# Altium PCB LED_Microcontroller_LED_PCB.PcbDoc
Units mm, origin at the board's own origin, x right, y up, seen from the top; angles counter-clockwise.
Board outline 88.3 x 38.73 mm, 2 copper layers (Top Layer, Bottom Layer); 42 components, 38 nets, 186 pads, 33 vias.
Unrouted connection lines stored in the file: 8.
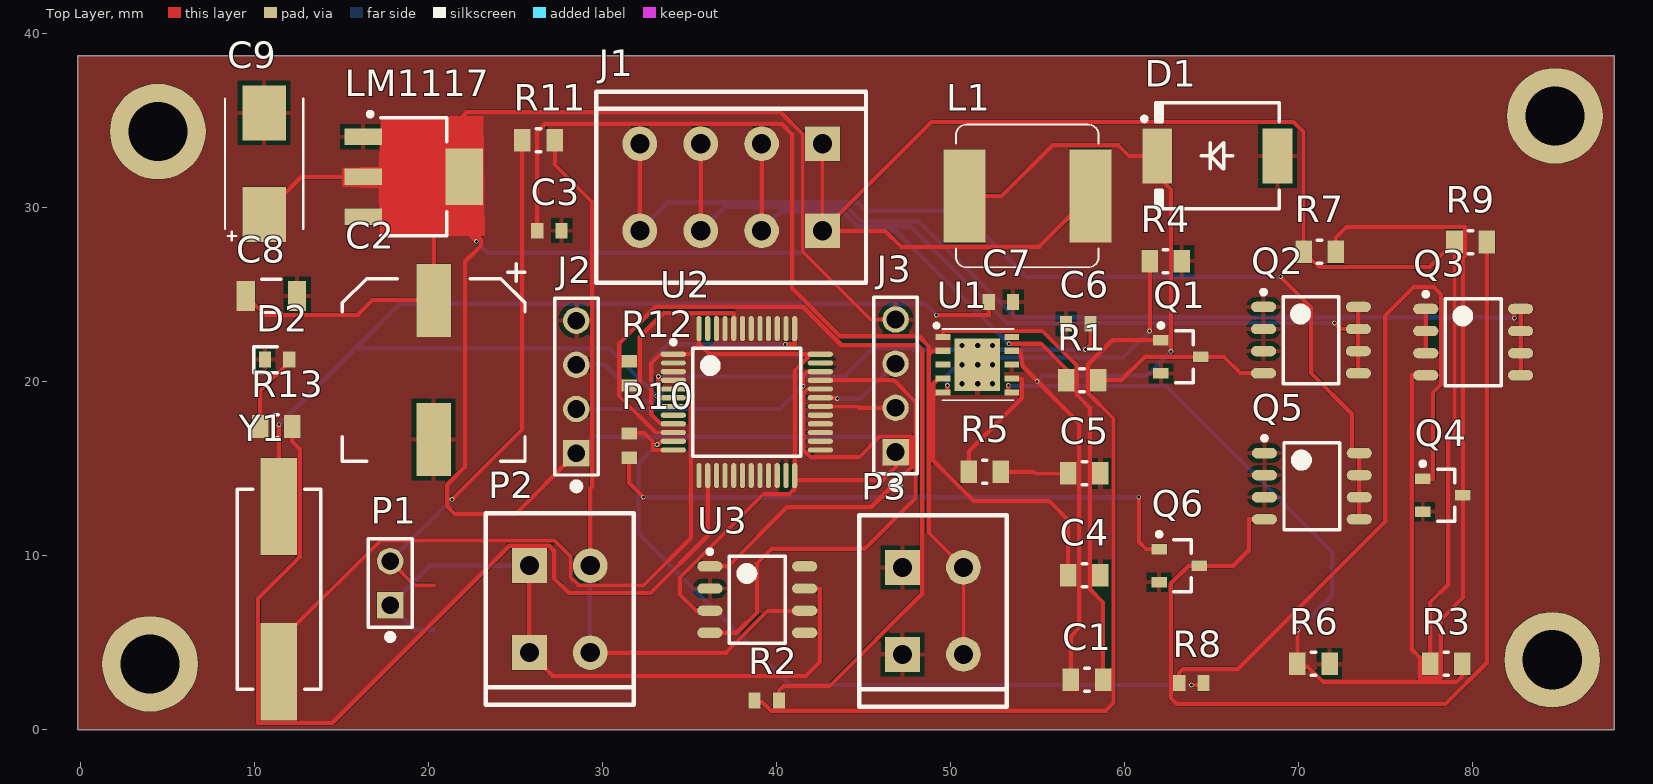
[diagram p0: Top Layer view]
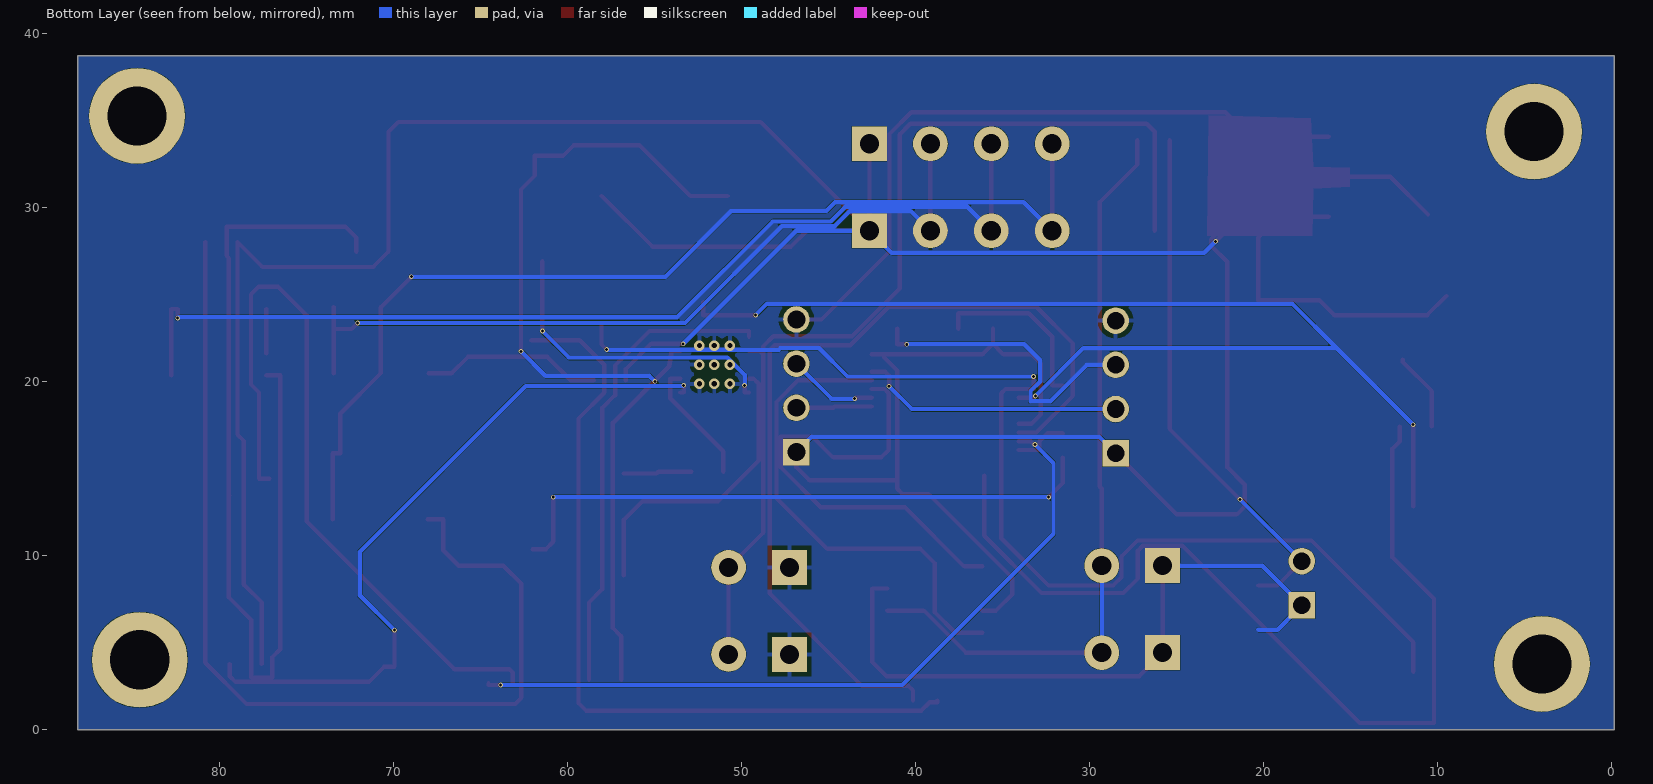
[diagram p1: Bottom Layer view, seen from below]

## Layer stack, top to bottom
Top Solder: solder mask 0.0102, Solder Resist, Dk 3.5
Top Layer: signal copper 0.0356
Dielectric 1: dielectric 0.32, FR-4, Dk 4.8
Bottom Layer: signal copper 0.0356
Bottom Solder: solder mask 0.0102, Solder Resist, Dk 3.5

## Board outline
-0.15,0 88.15,0 88.15,38.725 -0.15,38.725

## Design rules (kind name [scope] priority, off if disabled: settings)
Clearance [All] p1: gap=0.006 ignorepadtopadclearanceinfootprint=FALSE except(0: Arc-Hole Track-Hole SMDPad-Hole THPad-Hole Via-Hole Fill-Hole Poly-Hole Region-Hole Text-Hole; 0.004: Arc-Arc Arc-Track Arc-SMDPad Arc-THPad Arc-Via Track-Track Track-SMDPad Track-THPad Track-Via SMDPad-SMDPad SMDPad-THPad SMDPad-Via THPad-THPad THPad-Via Via-Via; 0.254: Arc-Text Track-Text SMDPad-Text THPad-Text Via-Text Fill-Text Poly-Text Region-Text Text-Text)
PolygonConnect [All] p1: connectstyle=Relief reliefconductorwidth=0.254 reliefentries=4 polygonreliefangle="90 Angle" airgapwidth=0.254
RoutingVias [All] p1: holewidth=0.17 width=0.27 viastyle="Through Hole" minholewidth=0.15 minwidth=0.25 maxholewidth=0.2 maxwidth=0.45
SolderMaskExpansion [All] p1: expansion=0.102 istentingtop=FALSE
Width [All] p1: maxlimit=25 minlimit=0.15 preferedwidth=0.25 minimp=50.000000 maximp=50.000000 favimp=50.000000
30 further rules are at their usual default settings.

## Components (designator, comment, footprint, x,y, rotation, side; value= is the part's Value field where it differs from the comment)
C1 "0.10uF" chip_0805 57.85,2.875 r0 top
C2 "47uF" CP_NICHICON_UUX_10x10 20.3,20.675 r0 top
C3 "2.2uF" chip_0603 26.95,28.675 r0 top
C4 "2700pF" chip_0805 57.7,8.875 r0 top
C5 "820pF" chip_0805 57.7,14.725 r0 top
C6 "18pF" chip_0603 57.35,23.325 r0 top
C7 "18pF" chip_0603 52.9,24.575 r0 top
C8 "10uF" chip_1206 10.975,24.925 r0 top
C9 "100uF" chip_2917_AVX_TAJD 10.55,32.525 r90 top
D1 "700mV" do-214ab 65.35,32.975 r0 top
D2 "2.65V" chip_0603_LED 11.3,21.275 r0 top
J1 "conn-4x1_0" TERM_3.50MM_4x1_0 42.65,28.675 r180 top
J2 "conn-4x1_0" HDDR_4x1_0 28.5,15.885 r90 top
J3 "conn-4x1_0" HDDR_4x1_0 46.85,15.955 r90 top
L1 "ind_1" VISHAY_IHLP3232DZ 54.42,30.675 r0 top
LM1117 "LM1117" sot-223-4 19.15,31.775 r0 top
P1 "conn-2x1_0" HDDR_2x1_0 17.8,8.425 r90 top
P2 "conn-2x1_0" TERM_3.50MM_2x1_0 25.8,4.425 r0 top
P3 "conn-2x1_0" TERM_3.50MM_2x1_0 47.25,4.325 r0 top
Q1 "MMBT3904LT1G" SOT-23-3_1 63.25,21.425 r0 top
Q2 "FDS5351" SO-8 70.725,22.39 r0 top
Q3 "FDS5351" SO-8 80.05,22.275 r0 top
Q4 "MMBT3904LT1G" SOT-23-3_1 78.3,13.475 r0 top
Q5 "FDS5351" SO-8 70.775,13.99 r0 top
Q6 "MMBT3904LT1G" SOT-23-3_1 63.15,9.425 r0 top
R1 "1k" chip_0805 57.575,20.075 r0 top
R2 "3.3k" chip_0603 39.45,1.675 r0 top
R3 "60.4k" chip_0805 78.5,3.775 r0 top
R4 "174k" chip_0805 62.375,26.925 r0 top
R5 "23.7k" chip_0805 51.975,14.825 r0 top
R6 "11.5k" chip_0805 70.875,3.775 r0 top
R7 "1k" chip_0805 71.225,27.475 r0 top
R8 "3.3k" chip_0603 63.85,2.675 r0 top
R9 "1k" chip_0805 79.9,28.025 r0 top
R10 "3.3k" chip_0603 31.55,16.325 r90 top
R11 "120" chip_0805 26.325,33.875 r0 top
R12 "1.1k" chip_0603 31.55,20.475 r90 top
R13 "665" chip_0805 11.25,17.425 r0 top
U1 "TPS54561" WSON-10_0 51.575,20.975 r0 top
U2 "STM32F103C8" LQFP48_0 38.3,18.825 r0 top
U3 "SN65HVD232" SO-8 38.9,7.475 r0 top
Y1 "osc_xtal_2p_0" ABLS_AT49_OSC 11.4,8.075 r90 top

## Footprints (in the part's own frame and the unit in brackets; to place one, negate y for a bottom-side part, rotate by r counter-clockwise, add the part's x,y. Pads: shape width x height; smd on the part's side, far side on the other; paste and mask are expansions set on the pad)
ABLS_AT49_OSC [mil] "ABLS Crystal Oscillator"
  rect 220x83 smd: 1(-187.01,0) 2(186.99,0)
  silkscreen extent -226,-94 226,94, body extent -224,-94 224,94, height 157
chip_0603 [mm]
  rect 0.7x0.9 smd: 1(-0.7,0) 2(0.7,0)
  body extent -0.85,-0.45 0.85,0.45, height 0.6
chip_0603_LED [mm]
  rect 0.7x0.9 smd: 1(-0.7,0) 2(0.7,0)
  silkscreen extent -1.35,-0.75 0,0.73, body extent -0.85,-0.45 0.85,0.45, height 0.6
chip_0805 [mm]
  rect 0.95x1.3 smd: 1(-0.925,0) 2(0.925,0)
  silkscreen extent -0.13,-0.66 0.13,0.66, body extent -1.05,-0.65 1.05,0.65, height 0.6
chip_1206 [mm]
  rect 1.05x1.7 smd: 1(-1.475,0) 2(1.475,0)
  silkscreen extent -0.55,-0.95 0.55,0.95, body extent -1.65,-0.85 1.65,0.85, height 0.6
chip_2917_AVX_TAJD [mm] "2917 footprint for AVX TAJD"
  rect 3.175x2.5 smd: 1(-2.921,0) 2(2.921,0)
  silkscreen extent -4.4,-2.25 3.75,2.25, body extent -3.75,-2.25 3.75,2.25, height 3.15
CP_NICHICON_UUX_10x10 [mm] "Nichicon UUX Series 10x10 SMD capacitor"
  rect 2x4.2 smd: 1(0,4) 2(0,-4)
  silkscreen extent -5.25,-5.25 5.25,6.1, body extent -5.24,-5.6 5.25,5.6, height 10.54
do-214ab [mm] "DO-214AB, SMC"
  rect 1.7x3.15 smd: 1(-3.45,0) 2(3.45,0)
  silkscreen extent -4.32,-3.05 3.55,3.05, body extent -3.56,-3.05 3.55,3.05, height 2.41
HDDR_2x1_0 [mil] "0.1\" Header 2x1"
  rect 60x60 hole 40: 1(-50.39,0)
  round 60 hole 40: 2(49.61,0)
  silkscreen extent -128,-50 100,50, body extent -100,-50 100,50, height 336
HDDR_4x1_0 [mil]
  rect 60x60 hole 40: 1(0,0)
  round 60 hole 40: 2(100,0) 3(200,0) 4(300,0)
  silkscreen extent -83,-49 350,49, body extent -50,-50 350,50, height 336
LQFP48_0 [mm] "LQFP48, 7.00x7.00mm, 0.50mm"
  oval 1.45x0.3 smd: 1(-4.225,2.75) 2(-4.225,2.25) 3(-4.225,1.75) 4(-4.225,1.25) 5(-4.225,0.75) 6(-4.225,0.25) 7(-4.225,-0.25) 8(-4.225,-0.75) 9(-4.225,-1.25) 10(-4.225,-1.75) 11(-4.225,-2.25) 12(-4.225,-2.75) 25(4.225,-2.75) 26(4.225,-2.25) 27(4.225,-1.75) 28(4.225,-1.25) 29(4.225,-0.75) 30(4.225,-0.25) 31(4.225,0.25) 32(4.225,0.75) 33(4.225,1.25) 34(4.225,1.75) 35(4.225,2.25) 36(4.225,2.75)
  oval 0.3x1.45 smd: 13(-2.75,-4.225) 14(-2.25,-4.225) 15(-1.75,-4.225) 16(-1.25,-4.225) 17(-0.75,-4.225) 18(-0.25,-4.225) 19(0.25,-4.225) 20(0.75,-4.225) 21(1.25,-4.225) 22(1.75,-4.225) 23(2.25,-4.225) 24(2.75,-4.225) 37(2.75,4.225) 38(2.25,4.225) 39(1.75,4.225) 40(1.25,4.225) 41(0.75,4.225) 42(0.25,4.225) 43(-0.25,4.225) 44(-0.75,4.225) 45(-1.25,4.225) 46(-1.75,4.225) 47(-2.25,4.225) 48(-2.75,4.225)
  silkscreen extent -4.35,-3.1 3.1,3.57, body extent -3.5,-3.5 3.5,3.5, height 1.6
SO-8 [mm] "SO-8 Package"
  oval 1.45x0.6 smd: 1(-2.725,1.905) 2(-2.725,0.635) 3(-2.725,-0.635) 4(-2.725,-1.905) 5(2.725,-1.905) 6(2.725,-0.635) 7(2.725,0.635) 8(2.725,1.905)
  silkscreen extent -2.85,-2.5 1.6,2.88, body extent -3.08,-2.5 3.08,2.5, height 2
SOT-23-3_1 [mm] "SOT-23-3 package"
  rect 0.9x0.6 smd: 1(-1.15,0.95) 2(-1.15,-0.95) 3(1.15,0)
  silkscreen extent -1.27,-1.5 0.7,1.92, body extent -1.42,-1.5 1.42,1.5, height 1.2
sot-223-4 [mm]
  rect 2.15x0.95 smd: 1(-2.9,2.3) 2(-2.9,0) 3(-2.9,-2.3)
  rect 2.15x3.25 smd: 4(2.9,0)
  silkscreen extent -2.62,-3.4 1.9,3.72, body extent -1.9,-3.4 1.9,3.4, height 1.1
TERM_3.50MM_2x1_0 [mm] "Terminal Block, 3.5mm pitch"
  rect 2x2 hole 1.1: 1(0,0) 1(0,5)
  round 2 hole 1.1: 2(3.5,0) 2(3.5,5)
  silkscreen extent -2.5,-3 6,8, body extent -2.5,-3 6,8, height 8.98
TERM_3.50MM_4x1_0 [mm]
  rect 2x2 hole 1.1: 1(0,0) 1(0,-5)
  round 2 hole 1.1: 2(3.5,0) 2(3.5,-5) 3(7,-5) 3(7,0) 4(10.5,-5) 4(10.5,0)
  silkscreen extent -2.5,-8 13,3, body extent -2.5,-8 13,3, height 8.98
VISHAY_IHLP3232DZ [mil] "Inductor, Vishay Dale, IHLP-3232DZ series"
  rect 95x210 smd: 1(-142.52,0) 2(142.52,0)
  silkscreen extent -161,-161 161,161, body extent -161,-161 161,161, height 157
WSON-10_0 [mm]
  rect 0.85x0.35 smd mask+0.07: 1(-2,1.6) 2(-2,0.8) 3(-2,0) 4(-2,-0.8) 5(-2,-1.6) 6(1.95,-1.6) 7(1.95,-0.8) 8(1.95,0) 9(1.95,0.8) 10(1.95,1.6)
  rect 2.6x3 smd mask+0.07: 11(-0.025,0)
  silkscreen extent -2.47,-2.05 2.05,2.35, body extent -2.05,-2.05 2.05,2.05, height 0.8

## Part data
C1: library part CAP-00069, "CAP, 0.10uF, 10%, 16V, X7R, 0805", Manufacturer=Murata, Manufacturer PN=GRM219R71C104KA01D, Tolerance=10%, Voltage Rating=16V, Capacitance=0.10uF, Part Number=CAP-00069, Type=X7R
C2: library part CAP-00567, "CAP, 47uF, ±20%, 100V, Al, SMD", Manufacturer=Nichicon, Manufacturer PN=UUX2A470MNL1GS, Tolerance=±20%, Voltage Rating=100V, Capacitance=47uF, Cost=$0.74, Part Number=CAP-00567, Type=Al
C3: library part CAP-00512, "CAP, 2.2uF, ±10%, 10V, X7R, 0603", Manufacturer=Murata, Manufacturer PN=GRM188R71A225KE15D, Tolerance=±10%, Voltage Rating=10V, Capacitance=2.2uF, Part Number=CAP-00512, Type=X7R
C4: library part CAP-00024, "CAP, 2700pF, 10%, 50V, X7R, 0805", Manufacturer=Murata, Manufacturer PN=GRM216R71H272KA01D, Tolerance=10%, Voltage Rating=50V, Capacitance=2700pF, Part Number=CAP-00024, Type=X7R
C5: library part CAP-00008, "CAP, 820pF, 10%, 50V, X7R, 0805", Manufacturer=Murata, Manufacturer PN=GRM216R71H821KA01D, Tolerance=10%, Voltage Rating=50V, Capacitance=820pF, Part Number=CAP-00008, Type=X7R
C6 C7: library part CAP-00409, "CAP, 18pF, ±2%, 50V, C0G, 0603", Manufacturer=Murata, Manufacturer PN=GRM1885C1H180GA01D, Tolerance=±2%, Voltage Rating=50V, Capacitance=18pF, Part Number=CAP-00409, Type=C0G
C8: library part CAP-00539, "CAP, 10uF, ±10%, 25V, X7R, 1206", Manufacturer=Samsung, Manufacturer PN=CL31B106KAHNNNE, Tolerance=±10%, Voltage Rating=25V, Capacitance=10uF, Part Number=CAP-00539, Type=X7R
C9: library part CAP-00550, "CAP, 100uF, ±10%, 16V, Tantalum, 2917", Manufacturer=AVX, Manufacturer PN=TAJD107K016RNJ, Tolerance=±10%, Voltage Rating=16V, Capacitance=100uF, Cost=$0.94, Part Number=CAP-00550, Type=Tantalum
D1: library part DIO-00048, "Dio, Schottky, 5A, 700mV, 60V, SMC", Current Rating=5A, Manufacturer="Diodes Incorporated", Manufacturer PN=B560C-13-F, Reverse Breakdown Voltage=60V, Cost=0.5, Forward Voltage=700mV, Part Number=DIO-00048, Type=Schottky
D2: library part DIO-00050, "LED, Green, 0603, Low current, HELI2 Series", Current Rating=30mA, Manufacturer=Kingbright, Manufacturer PN=APT1608LZGCK, Power Rating=120mW, Reverse Breakdown Voltage=5V, Cost=0.58, Forward Voltage=2.65V, Part Number=DIO-00050, Type=LED
J1: library part CONN-00024, "Term Blk, 4 Pos, 8A, 3.5mm Pitch, Screwless", Current=8, Manufacturer="Phoenix Contact", Manufacturer PN=1861959, Cost=1.67, Levels=1, Part Number=CONN-00024, Positions per level=4, Type="Terminal Block", Weight=2.3
J2 J3: library part CONN-00029, "Header 4x1, 0.1\"", Levels=1, Part Number=CONN-00029, Positions per level=4, Type=Header
L1: library part MAG-00106, "Ind, 10uH, 20%, 5.2A (9A sat.), 0.0599 Ohm", Current Rating=5.2A, Inductance=10uH, Manufacturer="Vishay Dale", Manufacturer PN=IHLP3232DZER100M01, Tolerance=20%, Cost=1.65, DCR=59.9mOhm, Part Number=MAG-00106
LM1117: library part PWREG-00018, "REG, Linear, Fixed 3V3, 800mA, SOT-223", Manufacturer=TI, Manufacturer PN=LM1117MPX-3.3/NOPB, Max Current=800mA, Voltage Range In="4.5 - 15V", Voltage Range Out=3.3V, Cost=1.14, Fixed/Adj=Fixed, Part Number=PWREG-00018, Reg Type=Linear
P1: library part CONN-00055, "Header, 2x1, 0.1\"", Manufacturer=Samtec, Manufacturer PN=TSW-102-07-F-S, Cost=0.2, Levels=1, Part Number=CONN-00055, Positions per level=2, Type=Header
P2 P3: library part CONN-00023, "Term Blk, 2 Pos, 8A, 3.5mm Pitch, Screwless", Current=8, Manufacturer="Phoenix Contact", Manufacturer PN=1861933, Cost=0.79, Levels=1, Part Number=CONN-00023, Positions per level=2, Type="Terminal Block", Weight=1.13
Q1 Q4 Q6: library part XSTR-00037, "XSTR, NPN, 200mA, 40V, Vce 0.3V, SOT-23-3", Manufacturer="ON Semi", Max Current=200mA, Max Power=300mW, Max Voltage=40V, Cost=0.12, Manufacturer PN=MMBT3904LT1G, Part Number=XSTR-00037, Type=NPN, Vgs/Vce=0.3V
Q2 Q3 Q5: library part XSTR-00034, "XSTR NFET, 6.1A, 60V, 5W, SOIC-8", Manufacturer="ON Semi", Max Current=6.1A, Max Power=5W, Max Voltage=60V, Cost=0.8, Manufacturer PN=FDS5351, Part Number=XSTR-00034, Type=NFET, Vgs/Vce=2.0V
R1 R7 R9: library part RES-00361, "RES SMD 1K OHM 1% 1/8W 0805", Manufacturer="Rohm Semiconductor", Manufacturer PN=KTR10EZPF1001, Power Rating=0.125W, Tolerance=1%, Part Number=RES-00361, Resistance=1k
R2 R8 R10: library part RES-00419, "RES SMD 3.3K OHM 1% 1/4W 0603", Manufacturer=Panasonic, Manufacturer PN=ERJ-PA3F3301V, Power Rating=0.25W, Tolerance=1%, Part Number=RES-00419, Resistance=3.3k
R3: library part RES-00531, "RES SMD 60.4K OHM 1% 1/8W 0805", Manufacturer="Rohm Semiconductor", Manufacturer PN=KTR10EZPF6042, Power Rating=0.125W, Tolerance=1%, Part Number=RES-00531, Resistance=60.4k
R4: library part RES-00350, "RES SMD 174K OHM 1% 1/8W 0805", Manufacturer="Rohm Semiconductor", Manufacturer PN=KTR10EZPF1743, Power Rating=0.125W, Tolerance=1%, Part Number=RES-00350, Resistance=174k
R5: library part RES-00392, "RES SMD 23.7K OHM 1% 1/8W 0805", Manufacturer="Rohm Semiconductor", Manufacturer PN=KTR10EZPF2372, Power Rating=0.125W, Tolerance=1%, Part Number=RES-00392, Resistance=23.7k
R6: library part RES-00309, "RES SMD 11.5K OHM 1% 1/8W 0805", Manufacturer="Rohm Semiconductor", Manufacturer PN=KTR10EZPF1152, Power Rating=0.125W, Tolerance=1%, Part Number=RES-00309, Resistance=11.5k
R11: library part RES-00183, "RES SMD 120 OHM 1% 1/8W 0805", Manufacturer="Rohm Semiconductor", Manufacturer PN=KTR10EZPF1200, Power Rating=0.125W, Tolerance=1%, Part Number=RES-00183, Resistance=120
R12: library part RES-00264, "RES SMD 1.1K OHM 1% 1/4W 0603", Manufacturer=Panasonic, Manufacturer PN=ERJ-PA3F1101V, Power Rating=0.25W, Tolerance=1%, Part Number=RES-00264, Resistance=1.1k
R13: library part RES-00248, "RES SMD 665 OHM 1% 1/8W 0805", Manufacturer="Rohm Semiconductor", Manufacturer PN=KTR10EZPF6650, Power Rating=0.125W, Tolerance=1%, Part Number=RES-00248, Resistance=665
U1: library part PWREG-00033, "REG, SW Buck Adj, 5A, 4.5-60V, 2.5MHz, TPS54561", Frequency=100kHz-2.5MHz, Manufacturer=TI, Manufacturer PN=TPS54561DPRR, Max Current=5A, Voltage Range In=4.5-60V, Voltage Range Out=0.8-58.8V, Cost=5.52, Fixed/Adj=Adj, Part Number=PWREG-00033, Reg Type="SW Buck"
U2: library part UCTRL-00008, "STM32 M3, LQFP-48", Manufacturer=ST, Manufacturer PN=STM32F103C8, Part Number=UCTRL-00008
U3: library part IFACE-00008, "CANbus Transceiver, Single channel, SN65HVD232", Manufacturer=TI, Manufacturer PN=SN65HVD232DR, Cost=2.01, Part Number=IFACE-00008
Y1: library part OSC-00002, "XTAL, 8MHz, 18pF, 20ppm", Frequency=8.000M, Load Capacitance=18pF, Manufacturer=Abracon, Manufacturer PN=ABLS-8.000MHZ-B2-T, Tolerance=20ppm, ESR=80, Part Number=OSC-00002, Stability=50ppm

## Free pads (board coordinates)
  round 5.5 hole 3.4: 1(84.75,35.275) 2(84.593,4.013) 3(4,3.775) 4(4.45,34.375)

## Via types
v1: diameter 0.27, hole 0.17, Top Layer to Bottom Layer, 24 vias
v2: diameter 0.6, hole 0.3, Top Layer to Bottom Layer, 9 vias

## Nets (pads, with @x,y where several pads share a name; then routed paths per layer and width w, separated by ;. In a path a pad name is that pad's centre, name@x,y a point inside that pad or via, vN(x,y) a via of type N, cw(c..) or ccw(c..) an arc to the next point about the centre after c; other vN are vias at no path point)
+12: C2.1 C8.1 J1.1 L1.2 LM1117.3 R1.1 R3.1 R7.1 R9.1 | length 156.4
  Top Layer w0.25: C8.1 10.6,23.825 15.933,23.825 16.784,24.675 C2.1 20.3,28.295 19.12,29.475 ; LM1117.3 19.12,29.475 ; v1(22.753,28.067) 21.344,29.475 19.12,29.475 ; J1.1@42.65,33.675 J1.1@42.65,28.675 ; v1(53.36,22.174) 55.202,22.174 56.65,20.726 R1.1 ; L1.2 55.127,27.762 47.162,27.762 46.249,28.675 J1.1@42.65,28.675 ; R3.1 77.575,7.299 78.607,8.331 78.607,16.586 78.975,16.954 R9.1 77.543,26.593 71.182,26.593 R7.1 70.3,34.366 69.741,34.925 48.9,34.925 J1.1@42.65,28.675
  Bottom Layer w0.25: v1(22.753,28.067) 23.413,27.406 41.381,27.406 42.65,28.675 46.858,28.675 v1(53.36,22.174)
+24: C3.1 P3.2 U1.2 | length 58.3
  Top Layer w0.25: C3.1 26.25,34.366 26.707,34.823 40.304,34.823 40.914,34.213 40.914,25.349 43.657,22.606 48.178,22.606 48.766,22.017 48.766,21.564 ; U1.2 48.977,21.775 48.766,21.564 ; P3.2@50.75,4.325 50.75,9.325 48.766,11.309 48.766,21.564
CANRX: U2.33 U3.4 | length 28.2
  Top Layer w0.25: U3.4 37.721,5.57 38.907,6.756 38.907,9.575 39.72,10.388 45.079,10.388 47.996,13.305 47.996,18.835 46.756,20.075 U2.33
CANTX: U2.32 U3.1 | length 26.9
  Top Layer w0.25: U3.1 37.213,9.38 40.609,12.776 45.453,12.776 47.741,15.064 47.741,16.846 45.943,16.846 44.742,15.646 41.98,15.646 41.549,16.078 41.549,19.329 41.795,19.575 U2.32
GND: C2.2 C3.2 C4.2 C5.2 C6.1 C7.2 C8.2 C9.2 D1.2 D2.1 J2.4 J3.4 LM1117.1 P3.1 Q1.2 Q2.1 Q2.2 Q2.3 Q4.2 Q5.1 Q5.2 Q5.3 Q6.2 R4.2 R6.2 R12.2 U1.8 U1.11 U2.7 U2.8 U2.23 U2.35 U2.47 U3.2 | length 40.1
  Top Layer w0.25: LM1117.1 20.771,34.075 22.18,35.483 40.253,35.483 41.498,34.239 41.498,27.482 45.405,23.575 J3.4
  other v2: 50.675,19.875 51.575,19.875 52.425,19.875 50.675,20.975 51.575,20.975 52.425,20.975 50.675,22.075 51.575,22.075 52.425,22.075
LED_BLUE: J1.4 Q5.5 Q5.6 Q5.7 Q5.8 | length 60.4
  Top Layer w0.25: J1.4@32.15,28.675 J1.4@32.15,33.675 ; v1(68.981,26.035) 70.733,24.282 70.733,20.497 73.07,18.161 73.07,15.895 Q5.8 Q5.7 Q5.6 Q5.5
  Bottom Layer w0.25: J1.4@32.15,28.675 33.788,30.313 44.628,30.313 45.122,29.819 50.591,29.819 54.376,26.035 v1(68.981,26.035)
LED_GREEN: J1.3 Q3.5 Q3.6 Q3.7 Q3.8 | length 59.7
  Top Layer w0.25: J1.3@35.65,28.675 J1.3@35.65,33.675 ; v1(82.417,23.647) 82.417,24.18 Q3.8 Q3.7 Q3.6 Q3.5
  Bottom Layer w0.25: J1.3@35.65,28.675 37.034,30.059 44.034,30.059 44.883,29.21 48.203,29.21 53.715,23.698 82.366,23.698 v1(82.417,23.647)
LED_RED: J1.2 Q2.5 Q2.6 Q2.7 Q2.8 | length 46.4
  Top Layer w0.25: J1.2@39.15,28.675 J1.2@39.15,33.675 ; v1(72.067,23.368) 72.41,23.025 Q2.7 ; Q2.5 Q2.6 Q2.7 ; Q2.8 Q2.7
  Bottom Layer w0.25: J1.2@39.15,28.675 40.279,29.804 43.779,29.804 44.653,28.93 47.695,28.93 53.258,23.368 v1(72.067,23.368)
NetC1_1: C1.1 D1.1 L1.1 U1.9 | length 56.9
  Top Layer w0.25: L1.1 52.953,30.675 55.857,33.578 59.659,33.578 60.262,32.975 D1.1 61.9,31.826 62.681,31.044 v1(62.681,21.742) ; U1.9 54.012,21.775 54.162,20.889 57.398,17.653 57.373,17.627 ; v1(54.985,20.015) 57.373,17.627 ; C1.1 56.925,5.368 57.398,5.842 57.398,17.602 57.373,17.627
  Bottom Layer w0.25: v1(54.985,20.015) 55.315,20.345 61.284,20.345 v1(62.681,21.742)
NetC1_2: C1.2 U1.1 | length 27.5
  Top Layer w0.25: U1.1 49.575,22.91 55.29,22.91 57.271,20.929 57.271,19.227 58.008,18.491 58.008,8.077 58.775,7.31 C1.2
NetC4_1: C4.1 U1.4 | length 17.4
  Top Layer w0.25: U1.4 49.321,20.175 49.021,19.875 49.021,15.464 51.353,13.131 55.696,13.131 56.775,12.053 C4.1
NetC5_1: C5.1 R5.2 | length 3.9
  Top Layer w0.25: R5.2 54.782,14.825 54.882,14.725 C5.1
NetC6_2: C6.2 U2.5 Y1.1 | length 68.6
  Top Layer w0.25: Y1.1 11.4,5.029 17.242,10.871 27.248,10.871 28.163,9.956 28.163,8.763 28.645,8.28 32.354,8.28 35.072,10.998 35.072,19.329 34.826,19.575 U2.5 33.217,19.575 v1(33.217,20.294) ; v1(57.754,21.844) 58.05,22.14 C6.2
  Bottom Layer w0.25: v1(33.217,20.294) 43.911,20.294 45.562,21.945 47.746,21.945 47.848,21.844 v1(57.754,21.844)
NetC7_1: C7.1 U2.6 Y1.2 | length 68.9
  Top Layer w0.25: Y1.2 v1(11.4,17.526) ; v1(33.116,19.177) 33.217,19.075 U2.6 ; v1(49.194,23.825) 52.2,23.825 C7.1
  Bottom Layer w0.25: v1(11.4,17.526) 15.794,21.92 ; v1(33.116,19.177) 30.373,21.92 15.794,21.92 ; v1(49.194,23.825) 48.534,24.485 18.36,24.485 15.794,21.92
NetD2_2: D2.2 R13.1 | length 4.5
  Top Layer w0.25: R13.1 10.325,19.456 12,21.131 D2.2
NetP1_1: P1.1 P2.1 U3.7 | length 36.6
  Top Layer w0.25: P2.1@25.8,9.425 25.8,4.425 27.152,3.073 41.676,3.073 42.488,3.886 42.488,8.11 U3.7
  Bottom Layer w0.25: P1.1 20.08,9.425 P2.1@25.8,9.425
NetP1_2: P1.2 R11.1 | length 27.3
  Top Layer w0.25: v1(21.348,13.233) 25.4,17.285 R11.1
  Bottom Layer w0.25: P1.2 v1(21.348,13.233)
NetP2_2: P2.2 R11.2 U3.6 | length 43.7
  Top Layer w0.25: R11.2 27.25,32.485 29.407,30.327 29.407,13.95 29.3,13.843 P2.2@29.3,9.425 ; P2.2@29.3,4.425 37.109,4.425 39.524,6.84 U3.6
  Bottom Layer w0.25: P2.2@29.3,4.425 29.28,4.445 29.28,9.405 P2.2@29.3,9.425
NetQ1_1: Q1.1 R2.1 | length 46
  Top Layer w0.25: R2.1 38.75,1.574 39.186,1.574 39.669,1.092 58.948,1.092 59.379,1.524 59.379,17.882 57.894,19.368 57.894,20.968 59.301,22.375 Q1.1
NetQ1_3: Q1.3 Q2.4 R1.2 | length 10.4
  Top Layer w0.25: R1.2 59.821,20.075 61.171,21.425 Q1.3 65.729,21.425 66.669,20.485 Q2.4
NetQ3_1: Q3.1 Q3.2 Q3.3 | length 2.5
  Top Layer w0.25: Q3.3 Q3.2 Q3.1
NetQ3_4: Q3.4 Q4.3 R7.2 | length 54.6
  Top Layer w0.25: R7.2 72.15,28.29 72.765,28.905 79.598,28.905 79.598,27.228 79.471,27.101 Q4.3@79.471,13.475 ; Q3.4 76.524,20.37 76.524,4.622 76.971,4.176 76.971,2.996 78.179,2.996 78.179,6.299 79.471,7.59 Q4.3@79.471,13.475 ; Q4.3 Q4.3@79.471,13.475
NetQ4_1: Q4.1 R8.1 | length 43.3
  Top Layer w0.25: R8.1 63.15,3.276 63.353,3.479 66.517,3.479 75,11.963 75,23.799 76.651,25.45 77.769,25.45 78.201,25.019 78.201,19.837 77.744,19.38 77.744,14.425 Q4.1
NetQ5_4: Q5.4 Q6.3 R9.2 | length 58
  Top Layer w0.25: Q5.4 67.152,12.085 67.152,10.314 66.263,9.425 Q6.3 63.697,9.425 62.656,8.384 62.656,1.828 63.012,1.473 78.455,1.473 80.825,3.843 R9.2
NetQ6_1: Q6.1 R10.1 | length 35
  Top Layer w0.25: R10.1 31.541,15.625 31.541,14.173 v1(32.354,13.36) ; v1(60.827,13.36) 60.827,10.795 61.247,10.375 Q6.1
  Bottom Layer w0.25: v1(32.354,13.36) v1(60.827,13.36)
NetR3_2: R3.2 R6.1 U1.6 | length 41.3
  Top Layer w0.25: v1(53.334,19.786) 53.334,19.375 U1.6 ; v1(69.95,5.719) R6.1 69.95,3.606 70.555,3.606 71.421,2.741 79.093,2.741 79.425,3.073 R3.2
  Bottom Layer w0.25: v1(53.334,19.786) 53.371,19.75 62.413,19.75 71.952,10.21 71.952,7.721 v1(69.95,5.719)
NetR4_1: R4.1 U1.5 | length 18
  Top Layer w0.25: U1.5 49.829,19.375 v1(49.829,19.786) ; v1(61.45,22.91) R4.1
  Bottom Layer w0.25: v1(49.829,19.786) 49.829,20.396 50.82,21.386 59.926,21.386 v1(61.45,22.91)
NetR5_1: R5.1 U1.7 | length 7.2
  Top Layer w0.25: R5.1 51.05,16.003 54.096,19.05 54.096,20.175 U1.7
NetR12_1: R12.1 U2.44 | length 10.2
  Top Layer w0.25: R12.1 32.151,19.775 32.151,22.58 33.497,23.926 37.55,23.926 U2.44
PA0-WKUP: R2.2 U2.10 | length 51.5
  Top Layer w0.25: U2.10 33.065,17.075 30.957,19.183 30.957,22.199 33.065,24.307 41.549,24.307 43.758,22.098 48.102,22.098 48.381,21.818 48.381,7.823 43.073,2.514 40.404,2.514 40.15,2.26 R2.2
PA1: R8.2 U2.11 | length 42.8
  Top Layer w0.25: v1(33.141,16.383) 33.203,16.383 33.395,16.575 U2.11 ; v1(63.85,2.565) 64.55,2.565 R8.2
  Bottom Layer w0.25: v1(33.141,16.383) 32.074,15.316 32.074,11.252 40.761,2.565 v1(63.85,2.565)
PA2: R10.2 U2.12 | length 3.2
  Top Layer w0.25: R10.2 32.43,17.025 32.874,16.581 32.874,16.075 U2.12
PA4: R13.2 U2.14 | length 55.2
  Top Layer w0.25: R13.2 12.175,16.56 12.593,16.143 12.593,9.906 10.205,7.518 10.205,0.381 14.472,0.381 24.658,10.566 26.944,10.566 27.223,10.287 27.223,8.686 28.061,7.848 32.76,7.848 36.05,11.138 U2.14
PA13: J2.2 U2.34 | length 15.3
  Top Layer w0.25: v1(41.523,19.735) 41.523,20.345 41.753,20.575 U2.34
  Bottom Layer w0.25: J2.2 40.213,18.425 v1(41.523,19.735)
PA14: J2.3 U2.37 | length 17.8
  Top Layer w0.25: v1(40.507,22.148) 41.05,22.148 U2.37
  Bottom Layer w0.25: J2.3 30.159,20.965 32.252,18.872 33.395,18.872 33.395,19.456 32.836,20.015 32.836,21.234 33.751,22.148 v1(40.507,22.148)
USART1_RX: J3.3 U2.31 | length 5.2
  Top Layer w0.25: U2.31 43.454,19.075 v1(43.504,19.024)
  Bottom Layer w0.25: v1(43.504,19.024) 44.839,19.024 J3.3
USART1_TX: J3.2 U2.30 | length 4.4
  Top Layer w0.25: U2.30 44.647,18.575 44.727,18.495 J3.2
VCC: C9.1 J2.1 J3.1 LM1117.2 LM1117.4 U2.1 U2.9 U2.24 U2.36 U2.48 U3.3 | length 103.3
  Top Layer w0.25: C9.1 12.721,31.775 LM1117.2 LM1117.4 22.05,29.15 23.017,28.183 23.017,27.813 22.092,26.888 22.092,15.087 21.076,14.071 21.076,12.827 21.533,12.369 24.984,12.369 J2.1 ; U2.9 33.344,17.575 32.811,18.108 32.811,21.042 33.344,21.575 U2.1 34.97,21.575 35.55,22.174 ; U2.48 35.55,22.174 ; U3.3 35.376,6.84 34.437,7.78 34.437,8.712 39.263,13.538 40.745,13.538 41.05,13.843 U2.24@41.05,14.335 ; U2.36 U2.36@41.803,21.575 ; J3.1 46.85,15.08 46.105,14.335 U2.24@41.05,14.335 ; 35.55,22.174 36.149,21.575 U2.36@41.803,21.575 ; U2.24@41.05,14.335 U2.24 41.05,20.634 41.803,21.386 U2.36@41.803,21.575
  Bottom Layer w0.25: J2.1 29.455,16.84 45.965,16.84 J3.1
pads on no net: U1.3 U1.10 U2.2 U2.3 U2.4 U2.13 U2.15 U2.16 U2.17 U2.18 U2.19 U2.20 U2.21 U2.22 U2.25 U2.26 U2.27 U2.28 U2.29 U2.38 U2.39 U2.40 U2.41 U2.42 U2.43 U2.45 U2.46 U3.5 U3.8
copper on no net: | length 5.8
  Top Layer w0.254: 17.9,9.585 19.2,8.285 20.3,8.285
  Bottom Layer w0.254: 18.1,7.025 18.1,6.825 19.18,5.745 20.3,5.745

## Polygon pours and split planes (outlines as drawn)
GND on Top Layer "Top -GND" (solid, pour order 17): -0.15,0 88.15,0 88.15,38.725 -0.15,38.725
GND on Bottom Layer "Bottom - GND" (solid, pour order 18): -0.15,0 88.15,0 88.15,38.725 -0.15,38.725

## Other copper
Top Layer:
  region net VCC: 17.15,32.35 17.3,35.15 23.153,35.303 23.246,28.4 17.2,28.4 17.15,31.1 15.05,31.2 15.05,32.3

## Silkscreen, mask and mechanical layers (free items; w line width, h text height)
Mechanical 1:
  lines w0.254: 0,0 0,38.675 0.6,38.675 88.15,38.675 88.15,0 0,0